# Altium PCB modFOC-MCU.PcbDoc (part 2 of 2)
Units mm, origin at the board's own origin, x right, y up, seen from the top; angles counter-clockwise.
Board outline 53.34 x 55.88 mm, 4 copper layers (Top Layer, Mid Layer 1, Mid Layer 2, Bottom Layer), stack 1.587 mm thick; 106 components, 96 nets, 421 pads, 189 vias.
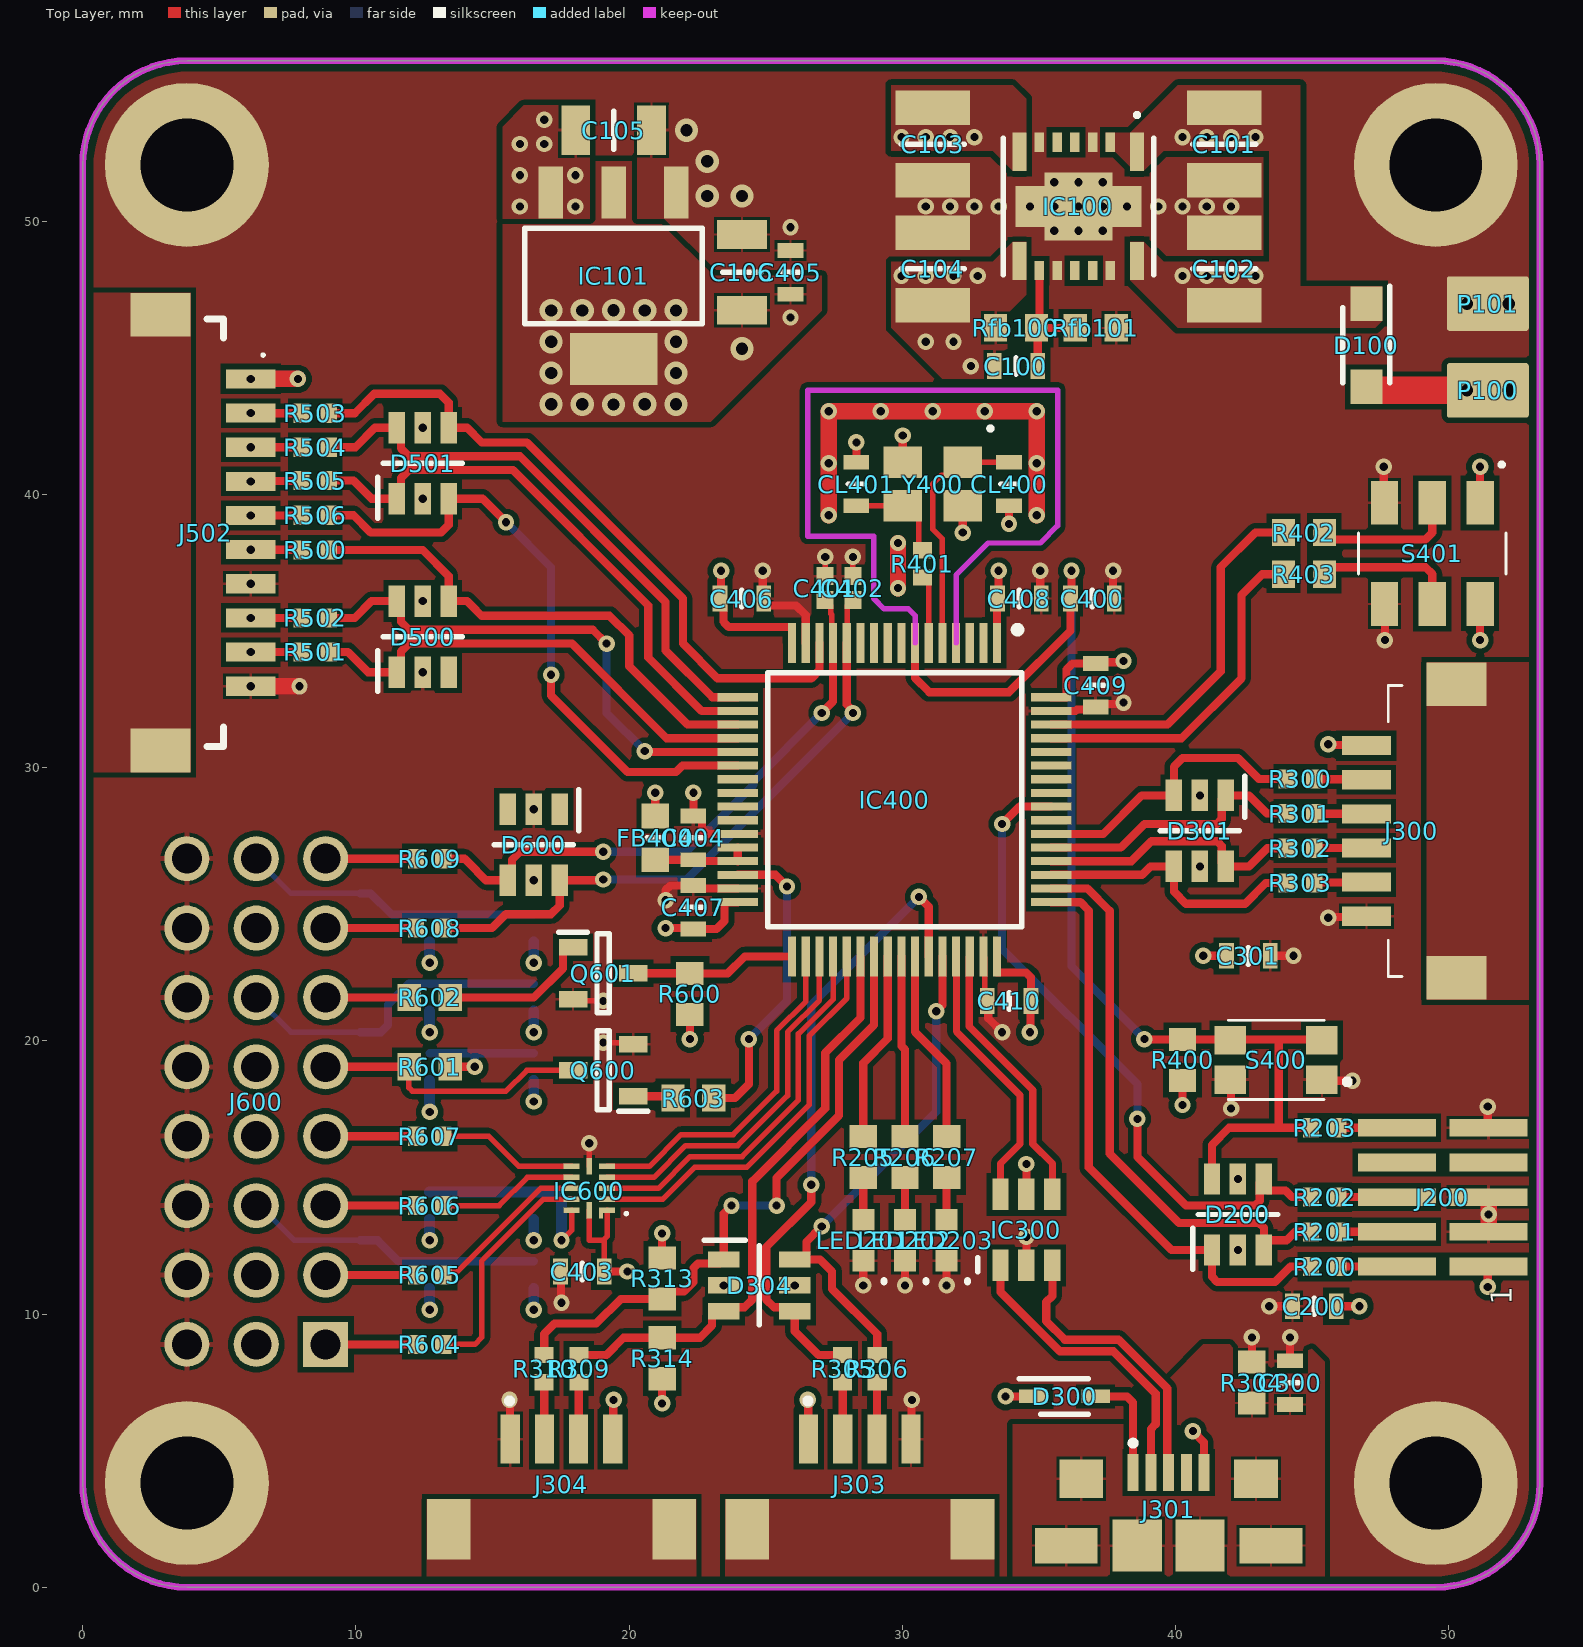
[diagram p0: Top Layer view]

## Silkscreen, mask and mechanical layers (free items; w line width, h text height) (continued)
Bottom Overlay: (continued)
  text "0" at 9.199,39.562 h0.5 r270
  text "1" at 9.199,38.398 h0.5 r270
  text "0" at 9.699,37.425 h0.5 r90
  text "A1" at 2.124,26.22 h0.9
  text "5V" at 13.45,26.22 h0.9
  text "3V3" at 17.71,26.22 h0.9
  text "Analog Supply" at 29.584,23.83 h0.9
  text "A2" at 2.274,23.68 h0.9
  text "RX" at 2.274,21.14 h0.9
  text "SBUS Level" at 26.885,21.14 h0.9
  text "SBUS Supply" at 27.935,18.75 h0.9
  text "TX" at 2.274,18.6 h0.9
  text "G1" at 2.124,16.06 h0.9
  text "GPIO Supply" at 27.785,13.67 h0.9
  text "G2" at 2.274,13.52 h0.9
  text "G3" at 2.274,10.98 h0.9
  text "GPIO Level" at 26.735,10.98 h0.9
  text "G4" at 2.274,8.44 h0.9
Board:
  the board outline again, w0.254

## Text inside footprints (layer, text, board x,y; h text height)
J200: Top Overlay "1" at 52.32,10.343 h0.76 r90